# Altium PCB Thermometer.PcbDoc
Units mil, origin at the board's own origin, x right, y up, seen from the top; angles counter-clockwise.
Board outline 700 x 1625 mil, 2 copper layers (Top Layer, Bottom Layer); 23 components, 21 nets, 84 pads, 23 vias.
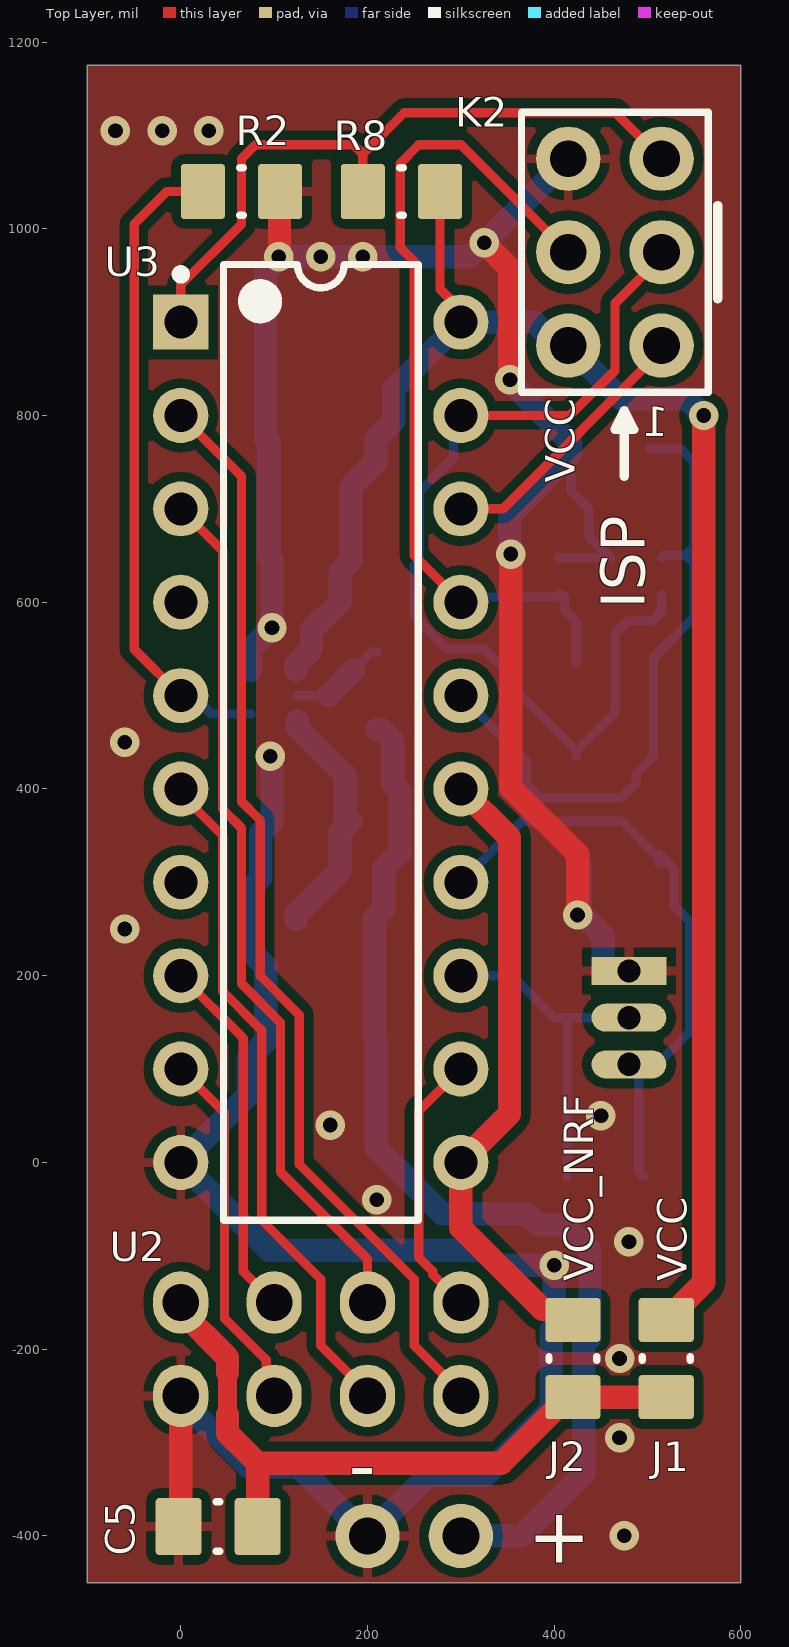
[diagram p0: Top Layer view]
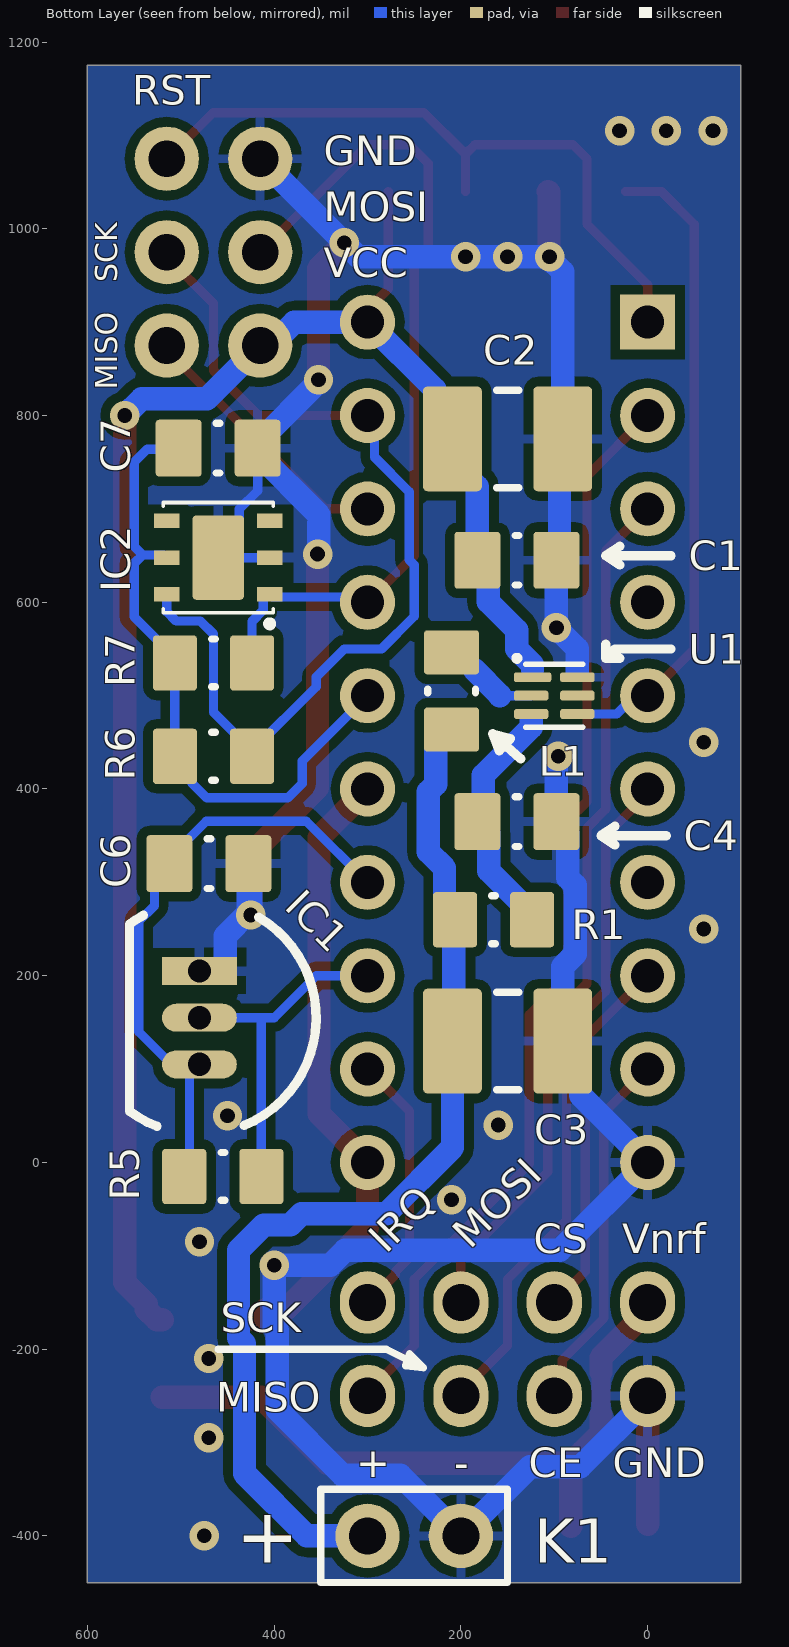
[diagram p1: Bottom Layer view, seen from below]

## Layer stack, top to bottom
Top Solder: solder mask 0.4, Solder Resist, Dk 3.5
Top Layer: signal copper 1.4
Dielectric 1: dielectric 12.6, FR-4, Dk 4.8
Bottom Layer: signal copper 1.4
Bottom Solder: solder mask 0.4, Solder Resist, Dk 3.5

## Board outline
-100,-450 -100,1175 600,1175 600,-450

## Design rules (kind name [scope] priority, off if disabled: settings)
Clearance Clearance_WOS [HasFootprint('WSON6M')] p1: gap=8 ignorepadtopadclearanceinfootprint=TRUE
Clearance [All] p2: gap=10 ignorepadtopadclearanceinfootprint=TRUE except(0: Arc-Hole Track-Hole SMDPad-Hole THPad-Hole Via-Hole Fill-Hole Poly-Hole Region-Hole Text-Hole)
PolygonConnect [All] p1: thpad.connectstyle=Relief thpad.reliefconductorwidth=10 thpad.reliefentries=4 thpad.polygonreliefangle="90 Angle" thpad.airgapwidth=10 smdpad.connectstyle=Relief smdpad.reliefconductorwidth=10 smdpad.reliefentries=4 smdpad.polygonreliefangle="90 Angle" smdpad.airgapwidth=10 via.connectstyle=Direct via.reliefconductorwidth=10 via.reliefentries=4 via.polygonreliefangle="90 Angle" via.airgapwidth=10
RoutingVias [All] p1: holewidth=15.75 width=31.5 viastyle="Through Hole" minholewidth=15.75 minwidth=31.5 maxholewidth=15.75 maxwidth=31.5
SolderMaskExpansion [All] p1: expansion=4 istentingtop=FALSE
Width [All] p1: maxlimit=25 minlimit=10 preferedwidth=10
30 further rules are at their usual default settings.

## Components (designator, comment, footprint, x,y, rotation, side; value= is the part's Value field where it differs from the comment)
C1 "100nF" C2012_0805I_M 140,645 r180 bottom
C2 "10uF" C3225_1210I_M 150,775 r180 bottom
C3 "10u" C3225_1210I_M 150,130 r180 bottom
C4 "100nF" C2012_0805I_M 140,365 r180 bottom
C5 "100nF" C2012_0805I_M 40,-390 r180 top
C6 "100nF" C2012_0805I_M 470,320 r180 bottom
C7 "100nF" C2012_0805I_M 460,765 r180 bottom
IC1 "DS18B20" TO92 480,105 r0 bottom
IC2 "SHT2x" DFN6 404.75,608.46 r0 bottom
J1 "N.F. or 0" R2012_0805I_M 520,-210 r270 top
J2 "N.F. or 0" R2012_0805I_M 420,-210 r270 top
K1 "H1x2" H1x2 300,-400 r0 bottom
K2 "H2x3" H2x3 515,875 r270 top
L1 "2.2uH" R2012_0805I_M 210,505 r90 bottom
R1 "300" R2012_0805I_M 165,260 r180 bottom
R2 "10MEG" R2012_0805I_M 65,1040 r0 top
R5 "10k" R2012_0805I_M 455,-15 r180 bottom
R6 "10k" R2012_0805I_M 465,435 r180 bottom
R7 "10k" R2012_0805I_M 465,535 r180 bottom
R8 "10k" R2012_0805I_M 236.34,1040 r180 top
U1 "TPS610982DSE" WSON6M 100,500 r270 bottom
U2 "NRF24L01+" NRF24L01+tht_module 150,150 r90 top locked
U3 "ATtiny2313-20PU" 20P3 150,450 r0 top locked

## Footprints (in the part's own frame and the unit in brackets; to place one, negate y for a bottom-side part, rotate by r counter-clockwise, add the part's x,y. Pads: shape width x height; smd on the part's side, far side on the other; paste and mask are expansions set on the pad)
20P3 [mm] "DIP, 20-Pin, Row Spacing 7.62 mm, Pitch 2.54 mm"
  rect 1.5x1.5 hole 0.9: 1(-3.81,11.43)
  round 1.5 hole 0.9: 2(-3.81,8.89) 3(-3.81,6.35) 4(-3.81,3.81) 5(-3.81,1.27) 6(-3.81,-1.27) 7(-3.81,-3.81) 8(-3.81,-6.35) 9(-3.81,-8.89) 10(-3.81,-11.43) 11(3.81,-11.43) 12(3.81,-8.89) 13(3.81,-6.35) 14(3.81,-3.81) 15(3.81,-1.27) 16(3.81,1.27) 17(3.81,3.81) 18(3.81,6.35) 19(3.81,8.89) 20(3.81,11.43)
  silkscreen extent -3.93,-13 2.65,13, body extent -3.6,-12.95 3.6,12.95, height 5.34
C2012_0805I_M [mm] "Chip Capacitor, 2-Leads, Body 2.05x1.25mm, IPC Low Density"
  rrect15% 1.25x1.55 smd: 1(-1.075,0) 2(1.075,0)
  silkscreen extent -0.05,-0.68 0.05,0.67, body extent -1.1,-0.7 1.1,0.7, height 1.4
C3225_1210I_M [mm] "Chip Capacitor, 2-Leads, Body 3.20x2.50mm, IPC Low Density"
  rrect15% 1.6x2.85 smd: 1(-1.5,0) 2(1.5,0)
  silkscreen extent -0.3,-1.32 0.3,1.33, body extent -1.75,-1.38 1.75,1.37, height 2.8
DFN6 [mm]
  rrect15% 1.4x2.3 smd: 0(1.4,-1)
  rect 0.7x0.4 smd: 1(0,0) 2(0,-1) 3(0,-2) 4(2.8,-2) 5(2.8,-1) 6(2.8,0)
  silkscreen extent -0.1,-2.5 2.9,0.85, body extent -0.11,-2.5 2.91,0.5, height 1.1
H1x2 [mm]
  round 1.75 hole 1: 1(0,0) 2(-2.54,0)
  silkscreen extent -3.81,-1.27 1.27,1.27, body extent -3.81,-1.27 1.27,1.27, height 8.4
H2x3 [mm]
  round 1.75 hole 1: 1(0,0) 2(0,-2.54) 3(-2.54,0) 4(-2.54,-2.54) 5(-5.08,0) 6(-5.08,-2.54)
  silkscreen extent -6.35,-3.81 1.27,1.27, body extent -6.35,-3.81 1.27,1.27, height 8.4
NRF24L01+tht_module [mm]
  oval 1.7x1.5 hole 1: 1(-10.16,3.81) 2(-7.62,3.81) 3(-10.16,1.27) 4(-7.62,1.27) 5(-10.16,-1.27) 6(-7.62,-1.27) 7(-10.16,-3.81) 8(-7.62,-3.81)
  body extent -11.75,-9.61 17.25,5.39, height 13.21
R2012_0805I_M [mm] "Chip Resistor, 2-Leads, Body 2.05x1.25mm, IPC Low Density"
  rrect15% 1.2x1.5 smd: 1(-1.05,0) 2(1.05,0)
  silkscreen extent -0.05,-0.65 0.05,0.65, body extent -1.1,-0.7 1.1,0.7, height 0.8
TO92 [mil]
  rect 80x30 hole 25: 1(0,-100)
  oval 80x30 hole 25: 2(0,-50) 3(0,0)
  silkscreen extent -125,-158 75,65, body extent -122,-172 67,72, height 520
WSON6M [mm] "Small Outline No-Lead (SON), 0.50 mm pitch; 6 pin, 1.50 mm L X 1.50 mm W X 0.80 mm H body"
  rrect52% 0.27x1.02 smd: 1(-0.5,-0.59)
  rrect52% 0.27x0.94 smd: 2(0,-0.63) 3(0.5,-0.63) 4(0.5,0.63) 5(0,0.63) 6(-0.5,0.63)
  silkscreen extent -1.07,-1.07 0.86,0.78, body extent -0.75,-0.8 0.75,0.8, height 0.8

## Part data
C1 C2 C3 C4 C5 C6 C7: library part C, "Capacitor"
IC1: "Temperature sensor 1-wire interface"
IC2: max.Temperature=+125, min.Temperature=-40, Tolerance=5%, Voltage=50V
J1 J2 R1 R2 R5 R6 R7 R8: library part R, "R"
K1: "Header 1x2 (male)"
K2: "Header 2x3 (male)"
L1: library part L, "L", Supplier Part Number 1=1869751, Supplier 1=Farnell
U1: Supplier Part Number 1=2498499, Supplier 1=Farnell
U2: "2.4GHz low power, long range module"
U3: "Low Power tinyAVR® 8-Bit Microcontroller, 2.7-5.5V, 20MHz, 2K Flash Memory, Industrial Grade (-40°C to 85°C), 20-Lead PDIP, Pb-Free", Code_JEDEC=MS-001-AD, ComponentLink1Description="Manufacturer URL", ComponentLink1URL=http://www.atmel.com/, ComponentLink2Description="ATtiny2313 Datasheet", ComponentLink2URL=http://www.atmel.com/dyn/resources/prod_documents/doc2543.pdf, ComponentLink3Description="ATtiny2313 Summary", ComponentLink3URL=http://www.atmel.com/dyn/resources/prod_documents/doc2543S.pdf, DatasheetVersion="revL, Aug-2010", PackageDescription="20-lead (0.300\"/7.62mm Wide) Plastic Dual Inline Package (PDIP)", PackageReference=20P3, PackageVersion="revD, Oct-2010"

## Via types
v1: diameter 31.5, hole 15.75, Top Layer to Bottom Layer, tented both sides, 23 vias

## Nets (pads, with @x,y where several pads share a name; then routed paths per layer and width w, separated by ;. In a path a pad name is that pad's centre, name@x,y a point inside that pad or via, vN(x,y) a via of type N, cw(c..) or ccw(c..) an arc to the next point about the centre after c; other vN are vias at no path point)
CE: U2.3 U3.9 | length 391.4
  Top Layer w10: U3.9 46.83,53.17 46.83,-166.83 91.55,-211.55 91.55,-241.55 U2.3
CS: U2.4 U3.8 | length 391.4
  Top Layer w10: U3.8 66.83,133.17 66.83,-116.83 U2.4
GND: C1.2 C2.2 C3.2 C4.2 C5.2 C6.2 C7.2 IC1.1 IC2.0 IC2.2 K1.2 K2.6 R2.2 U1.6 U2.1 U3.10 | length 3839.3
  Top Layer w10: C5.2 C5.2@0,-387.68
  Top Layer w25: C5.2@0,-387.68 U2.1 ; v1(105,970) 105.67,970.67 105.67,1039.33 R2.2 ; v1(325,985) 352.51,957.49 v1(352.51,838.43) ; v1(353.52,651.6) 353.52,401.48 425,330 v1(425,265)
  Bottom Layer w10: IC2.2 IC2.0 437.31,670.39 437.31,699.86 417.68,719.49 417.68,759.09 C7.2
  Bottom Layer w25: U2.1 0,-253.94 72.09,-326.03 126.03,-326.03 K1.2 265,-335 326.41,-335 396.75,-264.66 396.75,-179.66 400,-176.41 v1(400,-110) 340,-110 324.04,-94.04 94.04,-94.04 U3.10 71.95,71.95 71.95,111 C3.2 90.94,209.82 77.54,223.23 77.54,296.77 85.57,304.8 85.57,352.89 C4.2 97.68,431.31 95.75,433.24 v1(95.75,435) ; 75.2,526.87 75.2,550.2 v1(97.68,572.68) C1.2 94.31,648.37 94.31,771.63 C2.2 90.94,954.19 105,968.24 v1(105,970) v1(150,970) v1(195,970) 310,970 v1(325,985) K2.6 ; v1(352.51,838.43) 352.51,836.07 417.68,770.91 C7.2 ; v1(353.52,651.6) 352.28,652.85 352.28,684.75 352.03,685 352.03,693.45 C7.2@417.68,759.09 ; v1(425,265) v1(425,265) 425.04,317.36 C6.2 427.68,267.32 452.5,242.5 452.5,207.5 455,205 IC1.1
  other v1: 475,-400 470,-295 470,-210 480,-85 210,-40 160,40 450,50 -60,250 -60,450 -70,1105 -20,1105 30,1105
IRQ: U2.8 U3.12 | length 287.3
  Top Layer w10: U2.8 270,-120 270,-116.72 255,-101.72 255,55 U3.12
ISP_MISO: K2.1 U3.18 | length 285.4
  Top Layer w10: U3.18 345,700 K2.1@515,870
ISP_MOSI: IC2.1 K2.4 R7.2 U3.17 | length 924.7
  Top Layer w10: U3.17 250,650 250,965 235,980 235,1070 255,1090 300,1090 K2.4
  Bottom Layer w10: U3.17 305.59,605.59 401.87,605.59 IC2.1 408.69,608.46 411.56,605.59 411.56,591.63 423.66,579.53 R7.2
ISP_RST: K2.5 R8.2 U3.1 | length 748.2
  Top Layer w10: U3.1 0,940 65,1005 65,1075 80,1090 185,1090 195,1080 ; R8.2 195,1080 ; K2.5 465.55,1124.45 239.45,1124.45 195,1080
  Bottom Layer w10: U3.1 U3.1@5,905
ISP_SCK: IC2.6 K2.3 R6.2 U3.19 | length 1029.1
  Top Layer w10: U3.19 416.72,800 465,848.28 465,920 K2.3@515,970
  Bottom Layer w10: U3.19 292.5,792.5 292.5,755.47 255.47,718.44 255.47,645.47 250,640 250,585 285,550 325,550 355,520 355,509.57 R6.2@423.66,440.91 ; R6.2 R6.2@423.66,440.91 ; IC2.6@515,608.45 515,590 505,580 479.05,580 465,565.95 465,482.24 R6.2@423.66,440.91
MISO: U2.7 U3.2 | length 1174.3
  Top Layer w10: U3.2 65,735 65,386.57 85,366.57 85,199.85 126.83,158.02 126.83,-1.83 250,-125 250,-196.06 300,-246.06 U2.7
MOSI: U2.6 U3.3 | length 932.8
  Top Layer w10: U3.3 45,655 45,378.28 65,358.28 65,191.57 106.83,149.73 106.83,-10.24 200,-103.4 U2.6
NetIC1_2: IC1.2 R5.2 U3.13 | length 368.6
  Bottom Layer w10: U3.13 355,200 400,155 413.66,155 ; R5.2 413.66,155 ; IC1.2 413.66,155
PMODE: R2.1 U1.4 U3.5 | length 697.2
  Top Layer w10: U3.5 -50,550 -50,1005 -15,1040 R2.1
  Bottom Layer w10: U3.5 13.27,500 32.96,480.32 U1.4
SCK: U2.5 U3.6 | length 732.8
  Top Layer w10: U3.6 0,395 45,350 45,183.28 86.83,141.45 86.83,-61.83 150,-125 150,-196.06 200,-246.06 U2.5
SW: L1.2 U1.2 | length 143.7
  Bottom Layer w10: U1.2 158.31,500 185.47,527.17 185.47,527.72 204.09,546.34 L1.2
  Bottom Layer w25: 158.31,500 158.31,500.55 L1.2@185.47,527.72
VBAT: C3.1 K1.1 L1.1 R1.1 | length 1150.5
  Bottom Layer w25: L1.1 215.91,463.66 227.03,452.54 227.03,405.07 235,397.1 235,332.9 217.46,315.36 217.46,271.12 R1.1 207.7,258.64 207.7,131.36 C3.1 209.06,15.94 280,-55 370.77,-55 382.8,-67.03 411.12,-67.03 438.25,-94.16 438.25,-187.66 431.75,-194.16 431.75,-333.25 365,-400 K1.1
VCC: C1.1 C2.1 J1.1 K2.2 R8.1 U1.1 U3.20 | length 1887.1
  Top Layer w10: R8.1 277.68,935.6 300,913.27 U3.20
  Top Layer w25: J1.1 525.91,-168.66 537.03,-157.54 537.03,-151.63 560,-128.66 v1(560,800)
  Bottom Layer w25: 123.23,527.5 123.23,533.23 140,550 140,570 170.67,600.67 170.67,633.34 C1.1 182.32,723.66 209.06,750.39 C2.1 228.05,794 228.05,828.05 U3.20 378.41,900 408.41,870 K2.2@415,870 ; K2.2 471.95,818.05 541.95,818.05 v1(560,800)
VCC_DS: C6.1 IC1.3 R5.1 U3.14 | length 657
  Bottom Layer w10: U3.14 365.51,365.51 472.72,365.51 512.32,325.91 C6.1 ; R5.1 490.63,-9.29 490.63,105.76 510.76,105.76 545,140 545,258.21 528.24,274.97 528.24,314.08 C6.1@512.32,330
VCC_NRF: J2.1 U3.11 U3.15 | length 674
  Top Layer w25: U3.15 352.03,347.97 352.03,52.03 U3.11 300,-70 387.54,-157.54 408.88,-157.54 J2.1
VCC_NRF24: C5.1 J1.2 J2.2 U2.2 | length 741.2
  Top Layer w20: 50,-270 50,-225
  Top Layer w25: U2.2 0,-158.89 50,-208.89 50,-225 ; 50,-270 50,-290 70,-310 82.32,-322.32 ; C5.1 82.32,-322.32 ; J1.2 J2.2 414.09,-251.34 343.11,-322.32 82.32,-322.32
VCC_SHT: C7.1 IC2.5 R6.1 R7.1 U3.16 | length 712
  Bottom Layer w10: U3.16 370,430 370,405.86 385.39,390.47 472.33,390.47 487.72,405.86 487.72,416.38 R6.1 R7.1 506.34,540.91 550,584.57 550,641.42 540.71,650.71 ; C7.1 503.39,763.93 536.07,763.93 550,750 550,660 540.71,650.71 ; IC2.5 517.86,650.71 540.71,650.71
VIN: C4.1 R1.2 U1.3 | length 260.6
  Bottom Layer w25: R1.2 123.66,265.91 170.22,312.46 170.22,352.89 C4.1 176.05,371.27 176.05,414.72 124.8,465.96 124.8,472.5
pads on no net: IC2.3 IC2.4 U1.5 U3.4 U3.7

## Polygon pours and split planes (outlines as drawn)
GND on Top Layer "GND-TOP" (solid, pour order 0): -100,-450 600,-450 600,1175 -100,1175
GND on Bottom Layer "GND-TOP" (solid, pour order 1): -100,-450 600,-450 600,1175 -100,1175

## Silkscreen, mask and mechanical layers (free items; w line width, h text height)
Top Overlay:
  lines w10: 475,735 475,805 ; 575,925 575,1025 ; 475,805 485,785 465,785 475,805
  text "1" at 522.13,777.87 h31.5
  text "VCC" at 422.13,727.87 h31.5 r90
  text "ISP" at 497.13,592.87 h47.24 r90
  text "VCC_NRF" at 441.88,-127.13 h31.5 r90
  text "VCC" at 542.13,-127.13 h31.5 r90
  text "-" at 179.87,-352.64 h59.06
  text "+" at 371.87,-428.97 h59.06
Bottom Overlay:
  lines w7.87: 460,-200 280,-200 240,-220 ; 240,-220 259.08,-217.9 255,-205 240,-220
  lines w10: -25,550 35,550 45,540 ; -25,650 45,650 ; -20,350 50,350 ; 30,540 45,540 ; 30,640 45,650 ; 35,340 50,350 ; 35,360 50,350 ; 45,555 45,540 ; 135.79,432.24 166,459 ; 525.55,38.59 ccw(c480,155) 555,55 ; 539.86,264.74 cw(c480,155) 555,255 ; 45,650 30,660 45,650 ; 166,459 147,454 159,441 166,459
  text "RST" at 552.13,1132.87 h31.5
  text "GND" at 347.13,1067.87 h31.5
  text "MOSI" at 347.13,1007.87 h31.5
  text "VCC" at 347.13,947.87 h31.5
  text "SCK" at 567.87,942.87 h23.62 r270
  text "MISO" at 567.87,827.87 h23.62 r270
  text "MOSI" at 190,-93.86 h31.5 r315
  text "Vnrf" at 27.13,-97.13 h31.5
  text "CS" at 122.13,-97.13 h31.5
  text "IRQ" at 280,-98.86 h31.5 r315
  text "SCK" at 457.13,-182.13 h31.5
  text "MISO" at 462.13,-267.13 h31.5
  text "GND" at 37.13,-337.13 h31.5
  text "CE" at 127.13,-337.13 h31.5
  text "+" at 312.13,-337.37 h31.5
  text "-" at 207.13,-337.87 h31.5
  text "+" at 372.87,-428.97 h59.06
Board Outline:
  the board outline again, w10